# EAGLE board coqui-v1.0 (EAGLE 7.1.0)
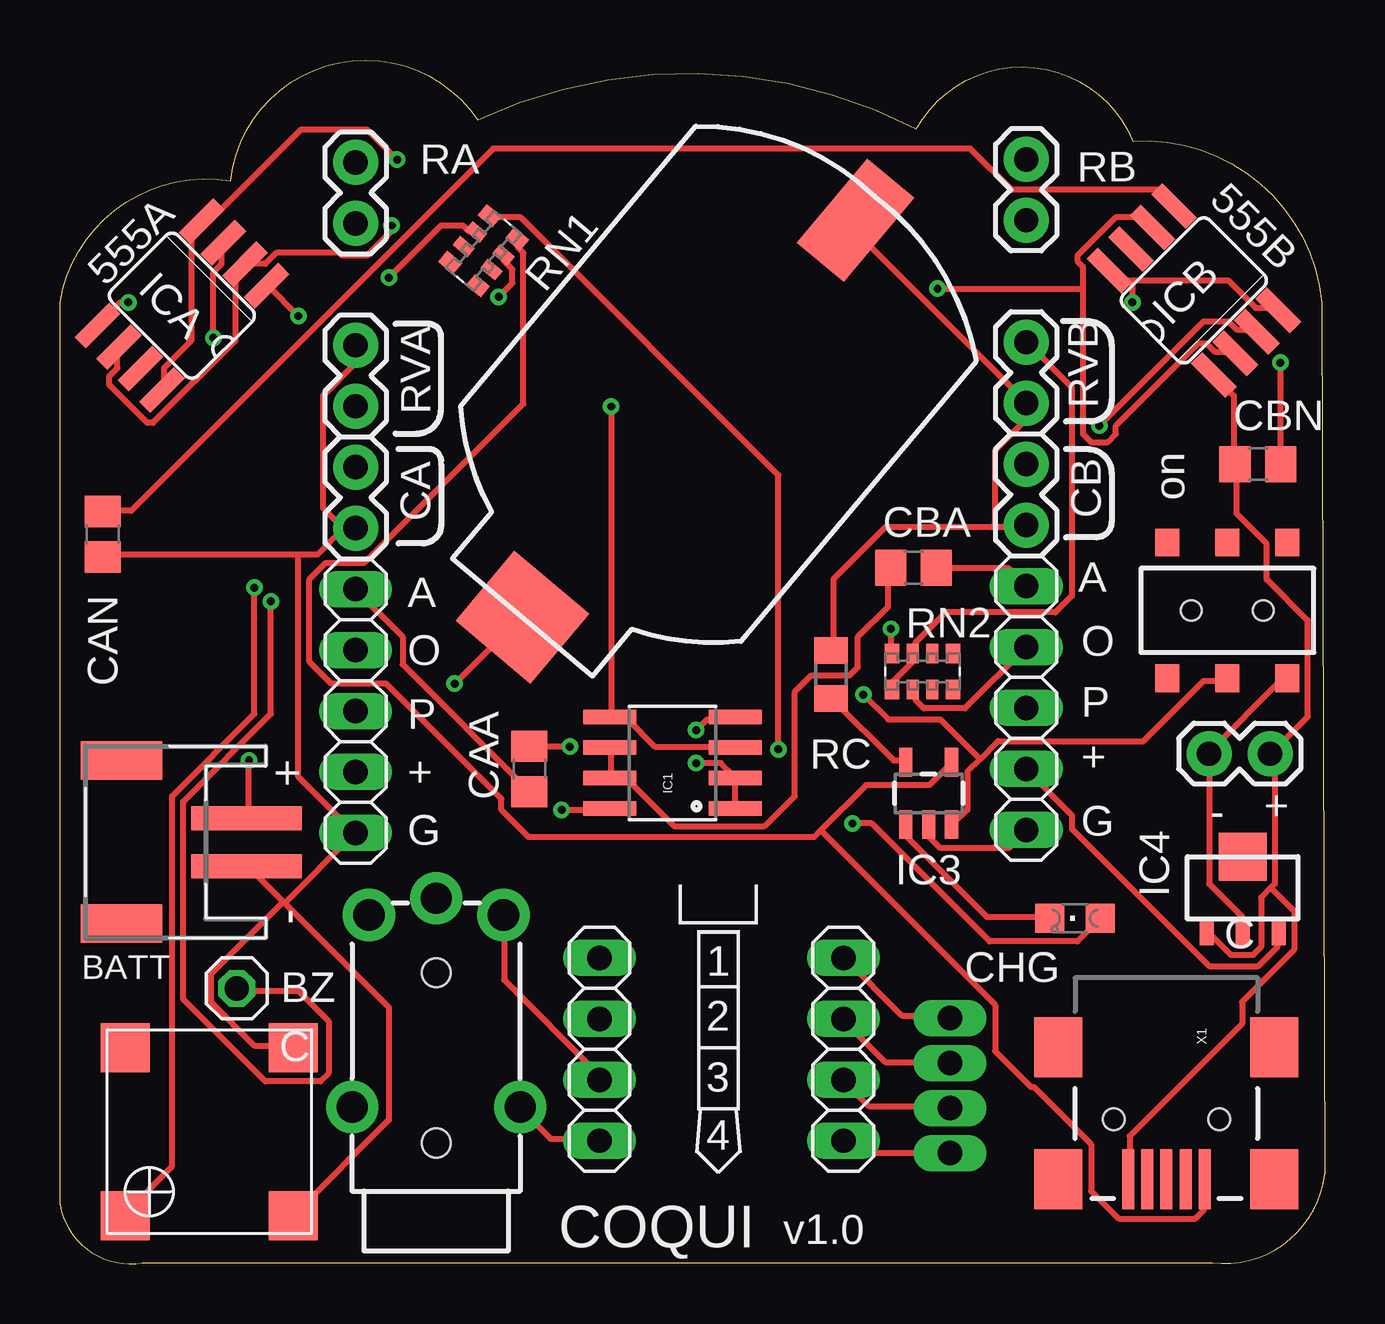
[diagram p0: board, top side]
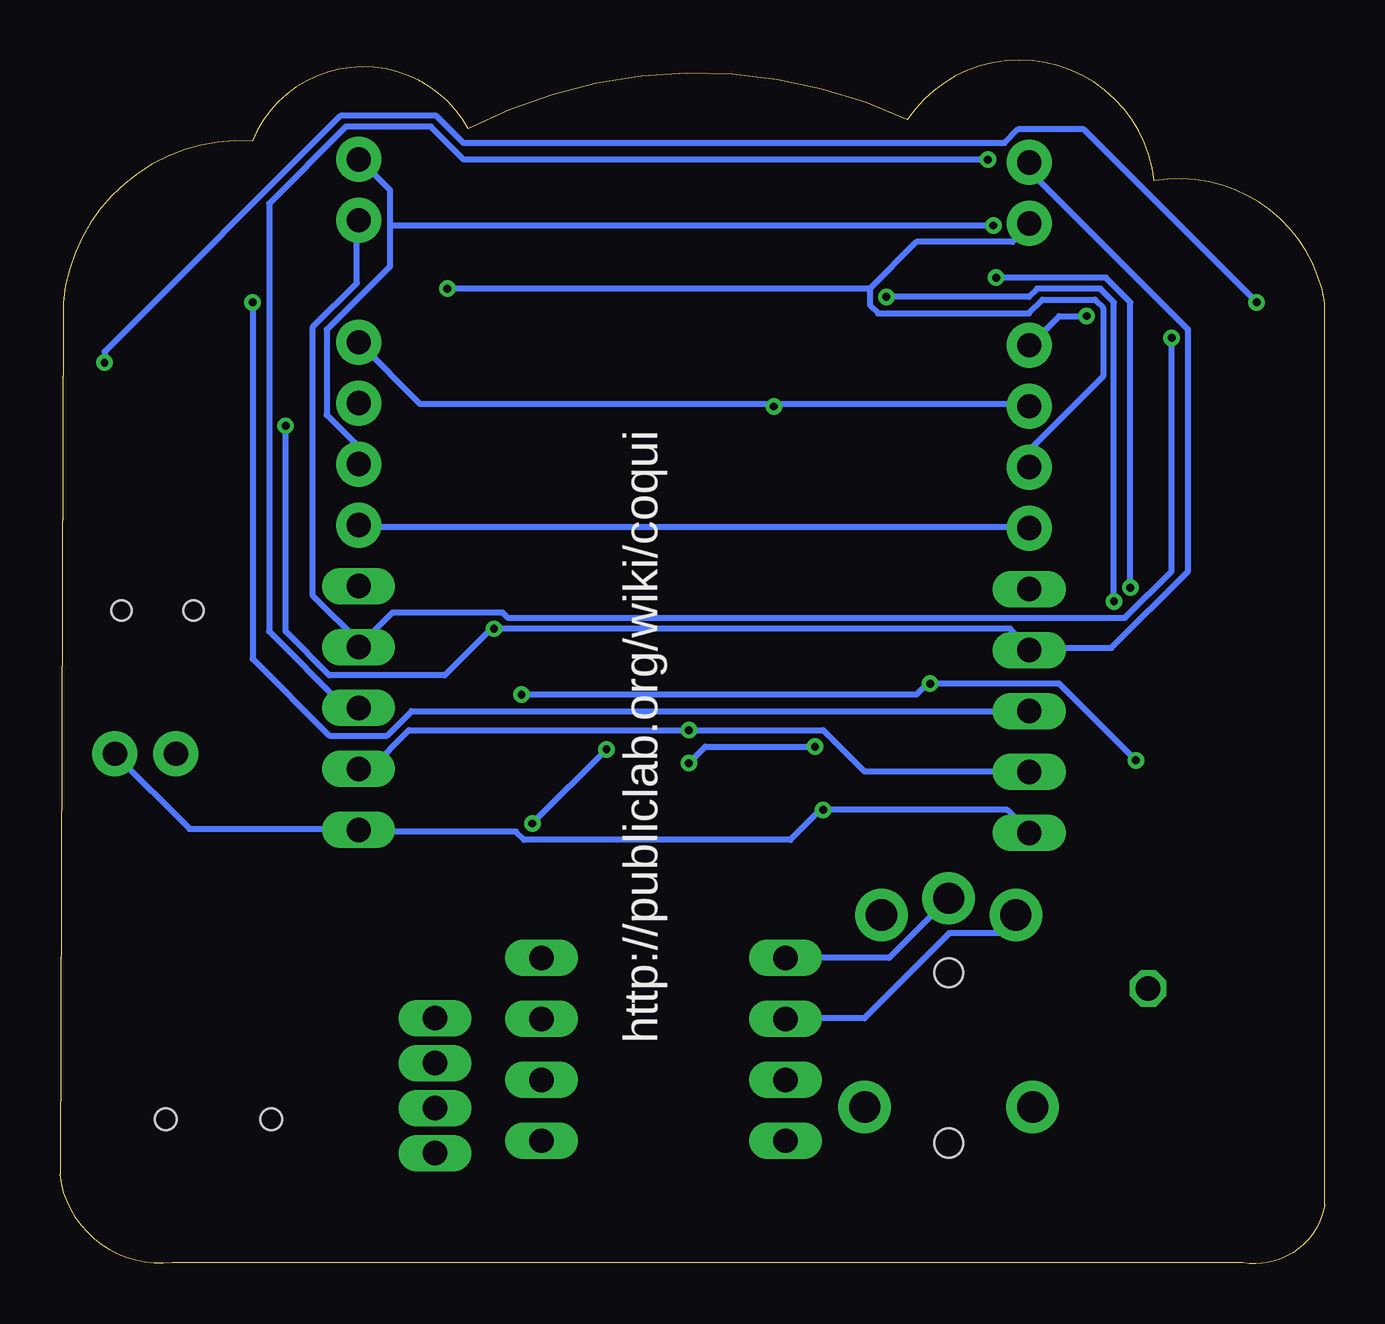
[diagram p1: board, bottom side, seen from below]

Size 52.7 x 50.16 mm. Coordinates in mm from the lower left corner, seen from the top.
Outline: 7.11,45.13 arc-140 17.4,47.67 arc-52 35.69,47.29 arc-128 44.7,46.78 arc-88 52.58,40.05 52.7,3.73 arc-90 48.01,0.04 3.43,0.04 arc-90 0,2.46 0,40.05 arc-90 7.11,45.13
Copper layers (1*16): Top 0.0356mm / dielectric 1.5011mm / Bottom 0.0356mm
Design rules "oshpark-2layer": minimum track width 6mil, minimum drill 13mil, track to track 6mil, track to pad 6mil, pad to pad 6mil, via to via 6mil, smd to smd 6mil, copper to edge 15mil, drill to drill 6mil, minimum pad ring 7mil, minimum via ring 7mil, stop-mask expansion 4mil, vias tented up to drill 0mil, thermal gap 10mil
Net classes: 0 default: width 0.254 mm, clearance 0.203 mm; 1 power: width 0.254 mm, clearance 0.178 mm

## Footprints (pad centres in the part's own frame; a part is rotated, then mirrored left to right if it is on the bottom)
BATTCOM_20MM_PTH_SMT = smd 4.572 x 2.54: P$1 0,0 | smd 3.81 x 4.064: P$2 21.59,0
JST-PH-2-SMT-RA = smd 1 x 4.6: 1 1,-3.7; 2 -1,-3.7 | smd 1.6 x 3.4: NC1 -3.4,1.5; NC2 3.4,1.5
1X01 = drill 1.016 octagon: 1 0,0
1X02 = drill 1.016 pad 1.88: 1 0,0; 2 2.54,0
C0805@1 = smd 1.3 x 1.5: 1 -0.95,0; 2 0.95,0
CHIPLED_0805 = smd 1.2 x 1.2: A 0,-1.05; C 0,1.05
SO08 = smd 0.61 x 2.21: 1 -1.905,-2.616; 2 -0.635,-2.616; 3 0.635,-2.616; 4 1.905,-2.616; 5 1.905,2.616; 6 0.635,2.616; 7 -0.635,2.616; 8 -1.905,2.616
SOT23-5 = smd 0.55 x 1.2: 1 -0.95,-1.3; 2 0,-1.3; 3 0.95,-1.3; 4 0.95,1.3; 5 -0.95,1.3
SOT89 = smd 0.58 x 1.2: 1 -1.5,-1.8; 2 0,-1.8; 3 1.5,-1.8 | smd 2 x 2: 4 0,1.3
SO08' = smd 0.66 x 2.032: 1 -1.905,-3.073; 2 -0.635,-3.073; 3 0.635,-3.073; 4 1.905,-3.073; 5 1.905,3.073; 6 0.635,3.073; 7 -0.635,3.073; 8 -1.905,3.073
AYZ0202 = smd 1 x 1.15: 1 -2.5,2.825; 2 0,2.825; 3 2.5,2.825; 4 -2.5,-2.825; 5 0,-2.825; 6 2.5,-2.825 | hole 0.85: 1.5,0; -1.5,0
MJ-2135 = drill 1.3 pad 2.184: 1 0,8.5; 1@2 7,8.5; 2 0.7,0.5; 3 6.3,0.5; 4 3.5,-0.2 | hole 1.2: 3.5,2.9; 3.5,10
1X04/90 = drill 1.016 long: 1 2.928,-2.286; 2 1.053,-2.286; 3 -2.697,-2.286; 4 -0.822,-2.286
1X05 = drill 1.016 long: 1 -5.08,0; 2 -2.54,0; 3 0,0; 4 2.54,0; 5 5.08,0
1X04 = drill 1.016 long: 1 -3.81,0; 2 -1.27,0; 3 1.27,0; 4 3.81,0
R0805 = smd 1.1 x 1.4: 1 -1,0; 2 1,0
EXB38V = smd 0.6 x 0.8: 1 -1.275,-0.75; 4 1.275,-0.75; 5 1.275,0.75; 8 -1.275,0.75 | smd 0.5 x 0.8: 2 -0.4,-0.75; 3 0.4,-0.75; 6 0.4,0.75; 7 -0.4,0.75
SMT-8585-BUZZER = smd 2.05 x 2.05: + -3.5,-3.5; - 3.5,-3.5; A- 3.5,3.5; NC1 -3.5,3.5
USB-MINIB = smd 2.5 x 0.5: D+ 2.5,0; D- 2.5,0.8; GND 2.5,-1.6; ID 2.5,-0.8; VBUS 2.5,1.6 | smd 2.5 x 2: GND@1 -3,-4.5; GND@2 -3,4.5; GND@3 2.5,4.5; GND@4 2.5,-4.5 | hole 0.9: 0,2.2; 0,-2.2

## Placement (x,y rotation side)
BAT1  LIR2032  [BATTCOM_20MM_PTH_SMT]  33.15,43.48 230 top
BATT  [JST-PH-2-SMT-RA]  4.06,17.57 90 top
BZ  [1X01]  7.37,11.47 180 top
CA  M02PTH  [1X02]  12.32,30.65 90 top
CAA  0.01uF  [C0805@1]  19.56,20.62 90 top
CAN  0.01uF  [C0805@1]  1.78,30.4 90 top
CB  M02PTH  [1X02]  40.26,30.78 90 top
CBA  0.01uF  [C0805@1]  35.56,29 0 top
CBN  0.01uF  [C0805@1]  49.91,33.32 0 top
CHG  0805  [CHIPLED_0805]  42.29,14.39 90 top
IC1  OPAMP-DUALU  [SO08]  25.53,20.87 90 top
IC3  MCP73831  [SOT23-5]  36.2,19.6 0 top
IC4  MCP1700-33  [SOT89]  49.28,15.66 0 top
ICA  LM555D  [SO08']  5.08,39.92 135 top
ICB  LM555D  [SO08']  47.24,40.56 45 top
J1  AYZ0202  [AYZ0202]  48.64,27.22 180 top
J-FEMALE  MJ-2135  [MJ-2135]  19.18,15.03 180 top
JP1  [1X04/90]  39.37,7.54 270 top
JP2  [1X05]  12.32,23.03 90 top
JP3  [1X04]  32.64,8.93 270 top
JP4  [1X04]  22.48,8.93 90 top
JP5  [1X05]  40.26,23.16 90 top
PWR  M02PTH  [1X02]  47.88,21.25 0 top
RA  M02PTH  [1X02]  12.32,43.35 90 top
RB  M02PTH  [1X02]  40.26,46.02 270 top
RC  22K  [R0805]  32.13,24.55 270 top
RN1  [EXB38V]  17.65,42.21 230 top
RN2  [EXB38V]  35.94,24.68 0 top
RVA  M02PTH  [1X02]  12.32,35.73 90 top
RVB  M02PTH  [1X02]  40.26,35.86 90 top
U$1  BUZZER  [SMT-8585-BUZZER]  6.22,5.5 0 top
X1  USBSMD  [USB-MINIB]  46.1,6.01 270 top

## Library data of the parts
BAT1 IC3 J1 = SparkFunNew
BATT IC4 ICA ICB U$1 = adafruit
BZ JP2-JP5 = pinhead
CA CB PWR RA RB RVA RVB = SparkFun-Connectors
CAA CAN CBA CBN = rcl
CHG = led
IC1 = SparkFun-AnalogIC
J-FEMALE = iPhoneSoftModem
JP1 = trrs-dwb
RC = adafruit2013
RN1 RN2 = resistor-dil; OC_FARNELL: unknown; OC_NEWARK: unknown
X1 = SparkFun

## Nets
AOUT: ICB.3 JP2.4 RA.2 RN2.8
BOUT: ICA.3 JP5.4 RB.2 RN2.2
GND: BAT1.P$1 BATT.2 CA.1 CAN.1 CB.1 CBN.1 IC1.8 IC3.2 IC4.1 ICA.1 ICB.1 JP2.1 JP5.1 PWR.2 RC.1 RVA.2 RVB.1 U$1.- U$1.A- X1.GND
N$1: J-FEMALE.1 JP4.1
N$2: J-FEMALE.2 JP4.2
N$3: IC3.5 RC.2
N$4: J-FEMALE.3 JP4.3
N$5: CHG.C IC3.1
N$6: J-FEMALE.4 JP4.4
N$7: BZ.1 RN1.7
N$8: CHG.A RN1.1
N$9: CAA.1 JP2.5
N$10: CAA.2 IC1.1 IC1.2
N$11: CA.2 ICB.2 ICB.6 RA.1
N$12: RN1.2 U$1.+
N$13: CBA.2 JP5.5
N$14: CAN.2 ICB.5
N$15: CBN.2 ICA.5
N$16: CB.2 ICA.2 ICA.6 RB.1
N$18: JP1.1 JP3.4
N$19: JP1.3 JP3.1
N$20: JP1.2 JP3.3
N$21: JP1.4 JP3.2
N$23: IC1.3 IC1.5 RN2.1 RN2.7 RVA.1 RVB.2
N$24: CBA.1 IC1.6 IC1.7
VAIN: ICB.4 ICB.8 JP2.3
VBAT [power]: BAT1.P$2 BATT.1 IC3.3 J1.2
VBIN: ICA.4 ICA.8 JP5.3
VBUS [power]: IC3.4 RN1.8 X1.VBUS
VCC: IC1.4 IC4.3 JP2.2 JP5.2
VDD: IC4.2 J1.1 PWR.1

## Tracks (layer width: path | path; a pad name or v marks a point on that pad's centre or on a via)
AOUT  (via drill 0.33)
  Top 0.254: v34.62,26.46 34.62,25.55 RN2.8 | v43.31,34.92 47.65,39.26 48.68,39.26 49.02,38.92 49.82,38.92 ICB.3
  Bottom 0.254: v43.31,34.92 43.31,26.35 41.48,24.52 36.68,24.52 34.73,26.46 v34.62,26.46 13.13,26.46 12.33,25.66 JP2.4 12.22,25.66 8.9,25.66 5.7,28.86 5.7,38.92 12.22,45.43 12.22,45.89 RA.2
BOUT  (via drill 0.33)
  Top 0.254: JP5.4 37.71,23.14 35.99,23.14 35.65,23.49 35.65,23.83 RN2.2 | v6.39,38.58 6.39,41.32 6.73,41.66 6.73,42.46 ICA.3
  Bottom 0.254: v6.39,38.58 6.39,28.86 8.33,26.92 34.05,26.92 34.28,27.15 38.85,27.15 40.22,25.77 JP5.4 40.22,25.89 42.16,27.83 42.16,39.03 40.34,40.86 40.34,43.38 RB.2
GND  (via drill 0.33)
  Top 0.254: IC3.2 36.22,18.23 36.22,17.77 36.68,17.32 39.53,17.32 40.22,18 JP5.1 | ICB.1 48.11,36.98 48.91,36.18 48.91,33.32 CBN.1 49.02,33.2 49.02,31.26 50.28,30 50.28,28.52 51.99,26.8 51.99,22.8 50.51,21.32 PWR.2 50.51,21.2 50.62,21.09 50.62,15.83 50.45,15.66 | 50.45,15.66 50.05,15.26 50.05,13.2 49.71,12.86 48.79,12.86 47.88,13.77 IC4.1 | 50.45,15.66 51.42,14.69 51.42,13.09 49.25,10.91 49.25,10 44.56,5.31 44.56,3.6 X1.GND | 38.96,30.69 40.22,30.69 CB.1 | 38.96,30.69 34.39,30.69 32.22,28.52 32.22,25.66 RC.1 | 38.96,30.69 38.96,33.89 40.22,35.15 40.22,35.83 RVB.1 40.22,35.95 33.25,42.92 33.25,43.38 BAT1.P$1 | v9.93,39.49 8.67,40.75 ICA.1 | 9.93,29.55 10.73,29.55 11.76,30.57 12.22,30.57 CA.1 11.76,30.69 10.96,31.49 10.96,36.18 12.22,37.43 12.22,38.23 RVA.2 | 9.93,29.55 1.82,29.55 CAN.1 | v20.9,18.92 22.85,18.92 IC1.8 | 9.3,15.09 7.87,16.52 BATT.2 | 9.3,15.09 9.36,15.03 | 9.36,15.03 13.7,10.69 13.7,6 9.82,2.11 U$1.- | 9.3,15.09 6.27,12.06 6.27,10.91 8.1,9.09 9.7,9.09 U$1.A- | 9.36,15.03 12.22,17.89 JP2.1 12.22,18 9.93,20.29 9.93,29.55
  Bottom 0.254: PWR.2 50.39,21.2 47.31,18.12 40.34,18.12 JP5.1 40.22,18 33.71,18 33.36,17.66 22.28,17.66 21.02,18.92 v20.9,18.92 13.25,18.92 12.33,18 JP2.1 | v9.93,39.49 11.07,39.49 12.22,38.35 RVA.2 | CB.1 40.22,30.69 12.33,30.69 CA.1
N$1
  Top 0.254: JP4.1 22.39,5.2 20.45,5.2 19.19,6.46 J-FEMALE.1
N$2
  Top 0.254: JP4.2 22.39,7.71 22.39,7.94 18.5,11.83 18.5,14.46 J-FEMALE.2
N$3
  Top 0.254: IC3.5 35.19,20.97 34.73,20.97 32.22,23.49 RC.2
N$4
  Bottom 0.254: JP4.3 22.39,10.23 19.19,10.23 15.65,13.77 13.59,13.77 12.9,14.46 J-FEMALE.3
N$5
  Top 0.254: CHG.C 41.13,14.46 38.62,14.46 35.31,17.77 35.31,18.23 IC3.1
N$6
  Bottom 0.254: JP4.4 18.16,12.74 15.76,15.14 J-FEMALE.4
N$7  (via drill 0.33)
  Top 0.254: v18.27,40.29 18.85,40.86 18.85,41.43 18.5,41.78 18.5,42 RN1.7 | v8.79,27.6 8.79,22.92 5.13,19.26 5.13,11.03 8.56,7.6 10.85,7.6 11.19,7.94 11.19,10.11 9.93,11.37 7.42,11.37 BZ.1
  Bottom 0.254: v18.27,40.29 12.33,40.29 11.99,40.63 9.36,40.63 8.79,40.06 v8.79,27.6
N$8  (via drill 0.33)
  Top 0.254: v29.93,21.43 29.93,32.86 19.19,43.6 17.93,43.6 RN1.1 | v33.02,18.34 33.82,18.34 38.73,13.43 42.39,13.43 43.31,14.34 CHG.A
  Bottom 0.254: v33.02,18.34 v29.93,21.43
N$9
  Top 0.254: CAA.1 19.53,19.72 14.28,24.97 14.28,26.12 12.33,28.06 JP2.5
N$10  (via drill 0.33)
  Top 0.254: v21.25,21.54 19.65,21.54 CAA.2 | v26.51,20.86 27.53,20.86 28.1,20.29 IC1.2 28.1,20.17 28.1,19.03 IC1.1
  Bottom 0.254: v21.25,21.54 25.82,21.54 v26.51,20.86
N$11  (via drill 0.33)
  Top 0.254: 42.62,40.63 42.62,41.55 42.39,41.78 42.39,42 43.99,43.6 45.14,43.6 45.48,43.26 ICB.6 | 42.62,40.63 42.62,34.57 42.96,34.23 43.65,34.23 43.99,34.57 43.99,34.92 47.42,38.35 47.77,38.35 48.11,38 48.91,38 ICB.2 | v36.56,40.63 42.62,40.63
  Bottom 0.254: 18.96,40.63 18.96,39.95 18.62,39.6 12.33,39.6 11.76,40.18 9.59,40.18 9.25,39.83 9.25,36.98 12.22,34 12.22,33.2 CA.2 | 18.96,40.63 17.02,42.58 13.02,42.58 12.33,43.26 RA.1 | 18.96,40.63 v36.56,40.63
N$12  (via drill 0.33)
  Top 0.254: v13.7,41.09 15.88,43.26 16.79,43.26 17.02,43.03 17.25,43.03 RN1.2 | v8.1,28.17 8.1,22.92 4.67,19.49 4.67,4.06 2.73,2.11 U$1.+
  Bottom 0.254: v13.7,41.09 9.13,41.09 8.1,40.06 v8.1,28.17
N$13
  Top 0.254: CBA.2 36.56,28.97 39.53,28.97 40.22,28.29 JP5.5
N$14
  Top 0.254: CAN.2 1.82,31.37 2.96,31.37 18.05,46.46 37.93,46.46 39.65,44.75 45.82,44.75 46.39,44.18 ICB.5
N$15  (via drill 0.33)
  Top 0.254: v50.85,37.55 50.85,33.32 CBN.2 | v2.84,40.06 2.5,40.06 1.59,39.15 ICA.5
  Bottom 0.254: v50.85,37.55 50.85,38 41.02,47.83 37.02,47.83 35.88,46.69 13.36,46.69 12.79,47.26 10.05,47.26 v2.84,40.06
N$16  (via drill 0.33)
  Top 0.254: ICA.6 2.39,38.12 2.39,37.32 2.04,36.98 2.04,36.63 3.65,35.03 3.87,35.03 7.3,38.46 7.3,41.2 7.64,41.55 ICA.2 7.76,41.66 8.56,41.66 9.02,42.12 11.65,42.12 11.76,42 12.79,42 13.82,43.03 v13.82,43.26
  Bottom 0.254: 38.96,43.26 38.96,44.75 40.22,46 RB.1 | 38.96,43.26 38.96,41.55 41.59,38.92 41.59,35.37 40.34,34.12 40.34,33.32 CB.2 | 38.96,43.26 v13.82,43.26
N$18
  Top 0.254: JP3.4 33.13,4.63 37.02,4.63 JP1.1
N$19
  Top 0.254: JP1.3 37.02,10.34 35.08,10.34 32.68,12.74 JP3.1
N$20
  Top 0.254: JP1.2 37.02,6.57 33.71,6.57 32.68,7.6 JP3.3
N$21
  Top 0.254: JP1.4 37.02,8.4 34.39,8.4 32.68,10.11 JP3.2
N$23  (via drill 0.33)
  Top 0.254: IC1.3 28.1,21.54 24.79,21.54 23.65,22.69 22.96,22.69 IC1.5 22.96,22.8 v22.96,35.72 | RN2.1 34.73,23.94 34.73,24.29 35.53,25.09 RN2.7 35.65,25.55 35.65,25.89 36.91,27.15 41.48,27.15 42.16,27.83 42.16,36.52 40.34,38.35 RVB.2
  Bottom 0.254: 22.96,35.83 37.71,35.83 40.22,38.35 RVB.2 | 22.96,35.83 12.33,35.83 RVA.1 | v22.96,35.72 22.96,35.83
N$24
  Top 0.254: CBA.1 34.51,28.97 34.51,27.37 33.25,26.12 33.25,24.86 32.91,24.52 31.31,24.52 30.62,23.83 30.62,19.49 29.36,18.23 25.59,18.23 23.65,20.17 22.96,20.17 IC1.7 22.96,20.29 22.96,21.43 IC1.6
VAIN  (via drill 0.33)
  Top 0.254: 44.68,40.98 44.11,40.98 43.76,41.32 ICB.8 | 44.68,40.98 48.68,40.98 49.82,39.83 50.74,39.83 ICB.4 | 44.68,40.98 v44.68,40.06
  Bottom 0.254: JP2.3 38.05,23.03 39.08,22 41.48,22 44.68,25.2 v44.68,40.06
VBAT  (via drill 0.33)
  Top 0.254: 38.34,21.03 37.82,20.52 37.82,18.92 37.25,18.34 IC3.3 | 38.34,21.03 39.08,21.77 45.14,21.77 47.65,24.29 48.56,24.29 J1.2 | v16.45,24.17 19.19,26.92 BAT1.P$2 | v7.87,20.97 7.87,18.57 BATT.1 | 38.34,21.03 36.68,22.69 34.51,22.69 v33.48,23.72
  Bottom 0.254: v7.87,20.97 11.07,24.17 v16.45,24.17 16.56,24.17 17.02,23.72 v33.48,23.72
VBIN  (via drill 0.33)
  Top 0.254: ICA.8 4.33,36.4 4.33,37.32 5.47,38.46 5.47,43.03 5.82,43.38 ICA.4 5.93,43.49 6.27,43.49 10.05,47.26 12.79,47.26 v14.05,46
  Bottom 0.254: v14.05,46 35.88,46 37.25,47.38 40.79,47.38 43.99,44.18 43.99,26.35 40.91,23.26 40.34,23.26 JP5.3
VBUS
  Top 0.254: 31.71,18.06 33.59,19.94 36.22,19.94 37.13,20.86 IC3.4 | 31.71,18.06 31.42,17.77 19.53,17.77 18.39,18.92 18.39,19.37 13.59,24.17 11.3,24.17 10.39,25.09 10.39,28.52 11.07,29.2 12.68,29.2 19.3,35.83 19.3,42.12 19.08,42.35 19.08,42.69 RN1.8 | 31.71,18.06 38.96,10.8 38.96,8.86 40.45,7.37 40.56,7.37 42.96,4.97 42.96,3.03 44.11,1.88 47.31,1.88 47.65,2.23 47.65,3.49 X1.VBUS
VCC  (via drill 0.33)
  Top 0.254: IC4.3 50.74,13.77 50.74,13.2 49.94,12.4 47.88,12.4 42.16,18.12 42.16,18.69 40.34,20.52 JP5.2 | v26.51,22.23 26.96,22.69 28.1,22.69 IC1.4
  Bottom 0.254: JP5.2 40.22,20.63 39.76,20.63 38.16,22.23 v26.51,22.23 20.9,22.23 19.19,20.52 12.33,20.52 JP2.2
VDD
  Top 0.254: J1.1 51.08,24.29 50.85,24.29 47.88,21.32 PWR.1 47.88,15.83 49.25,14.46 49.25,13.89 IC4.2

## Text on the board
tPlace: 555B | 555A | on | A | A | O | O | P | P | + | + | - | G | + | G | IC3 | IC4 | C | 1 | 2 | C | 3 | 4 | COQUI | v1.0
bPlace: http://publiclab.org/wiki/coqui